# Altium PCB H-bridge_test.PcbDoc
Units mil, origin at the board's own origin, x right, y up, seen from the top; angles counter-clockwise.
Board outline 2420 x 2070 mil, 2 copper layers (Top Layer, Bottom Layer); 25 components, 24 nets, 89 pads, 74 vias.
Unrouted connection lines stored in the file: 16.
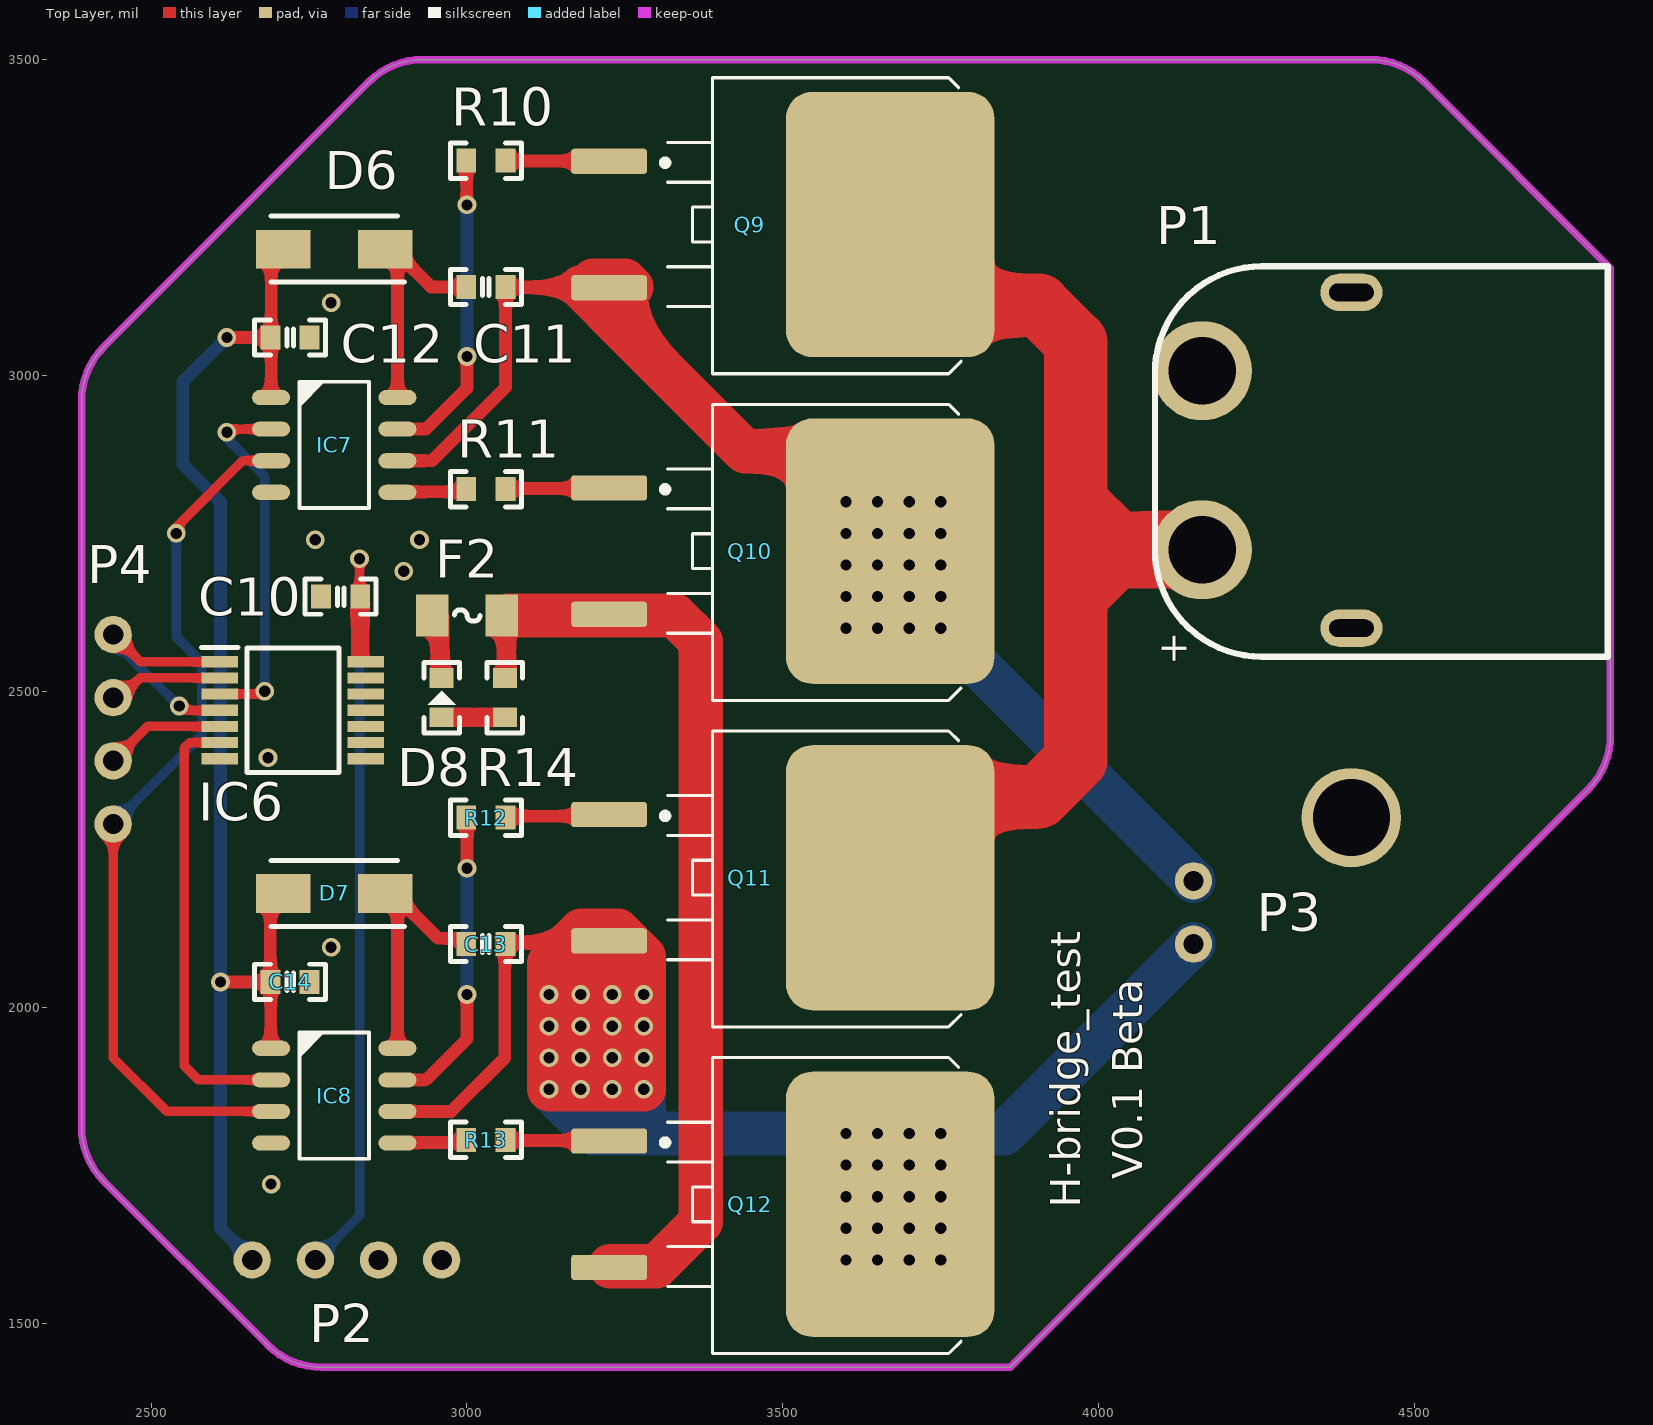
[diagram p0: Top Layer view]
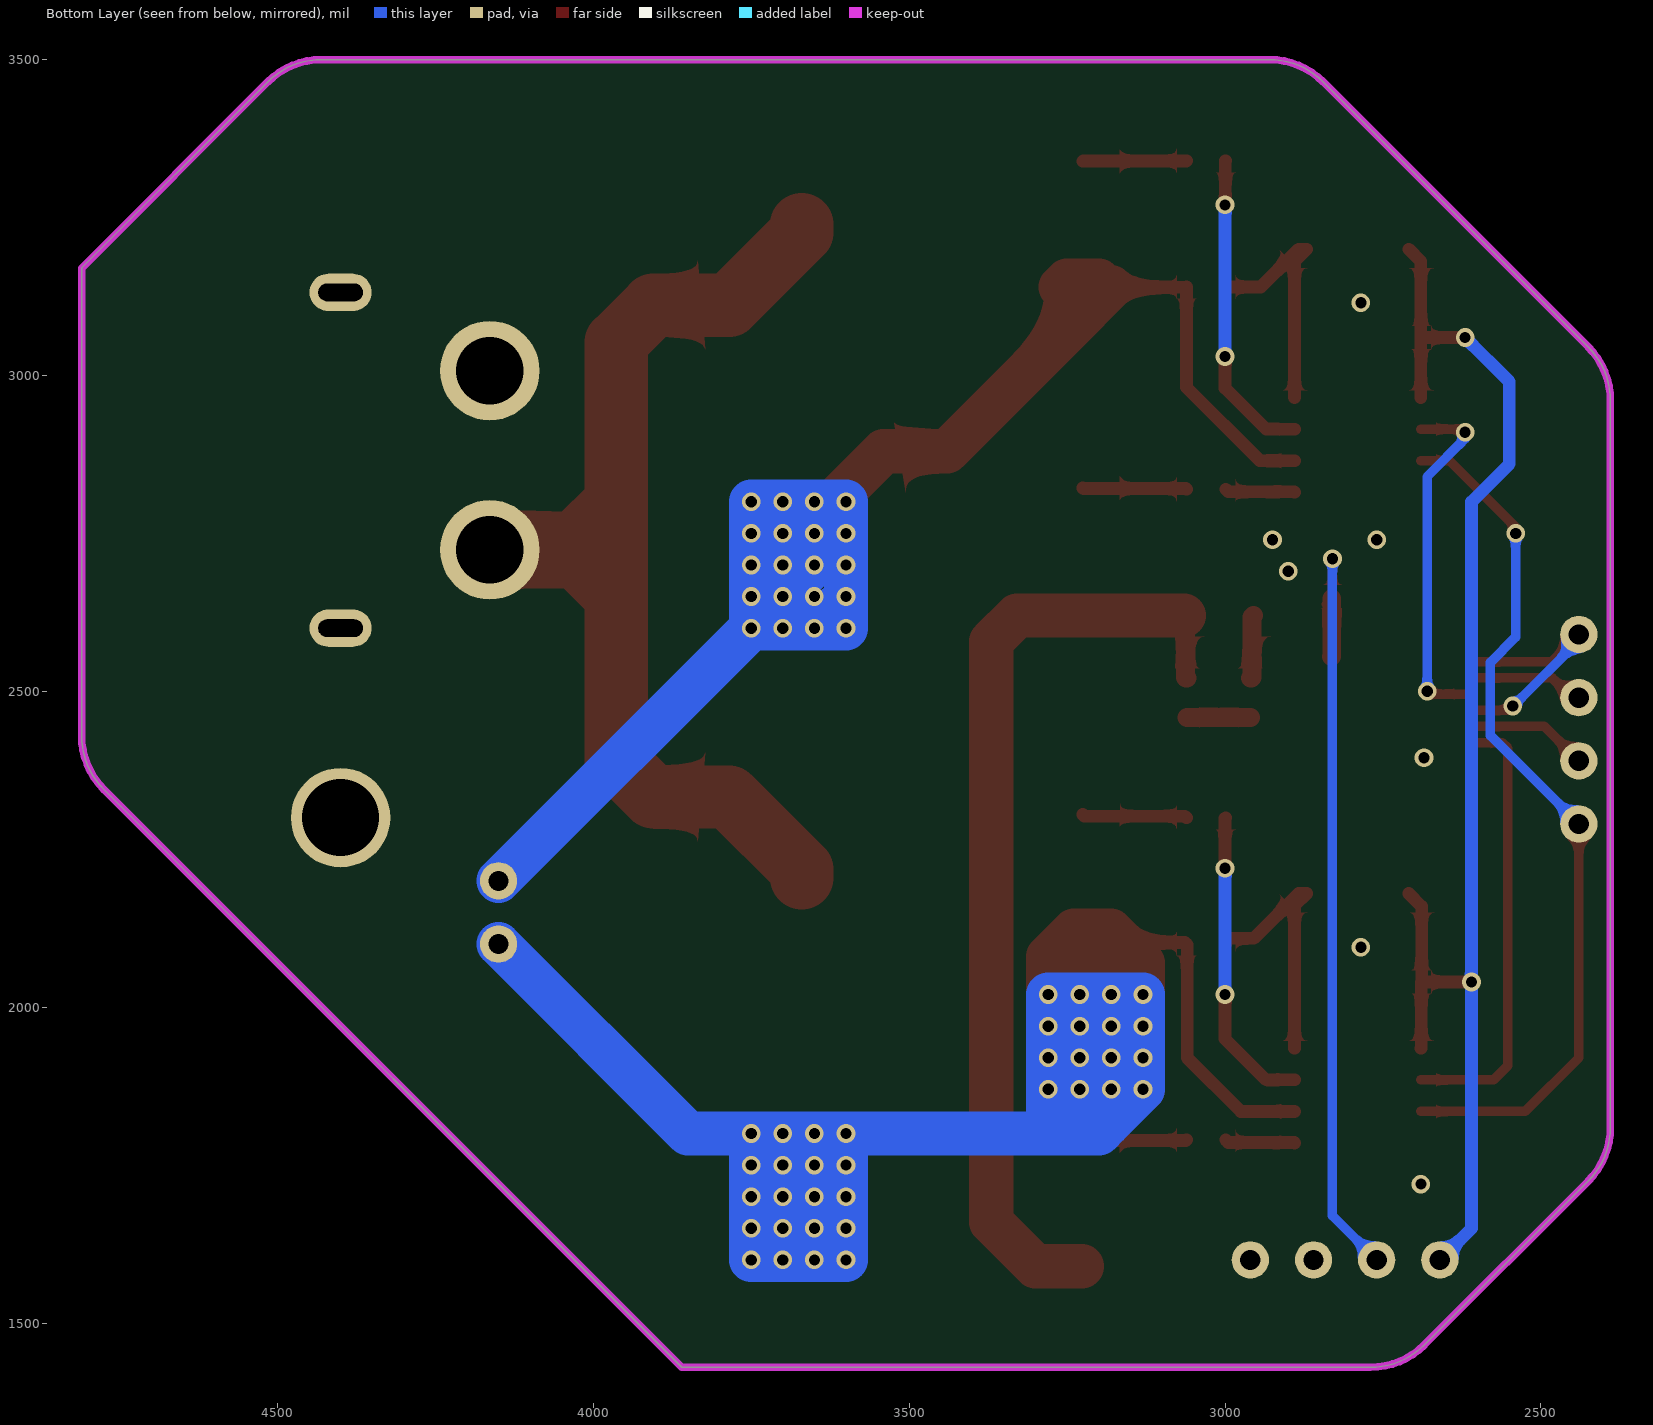
[diagram p1: Bottom Layer view, seen from below]
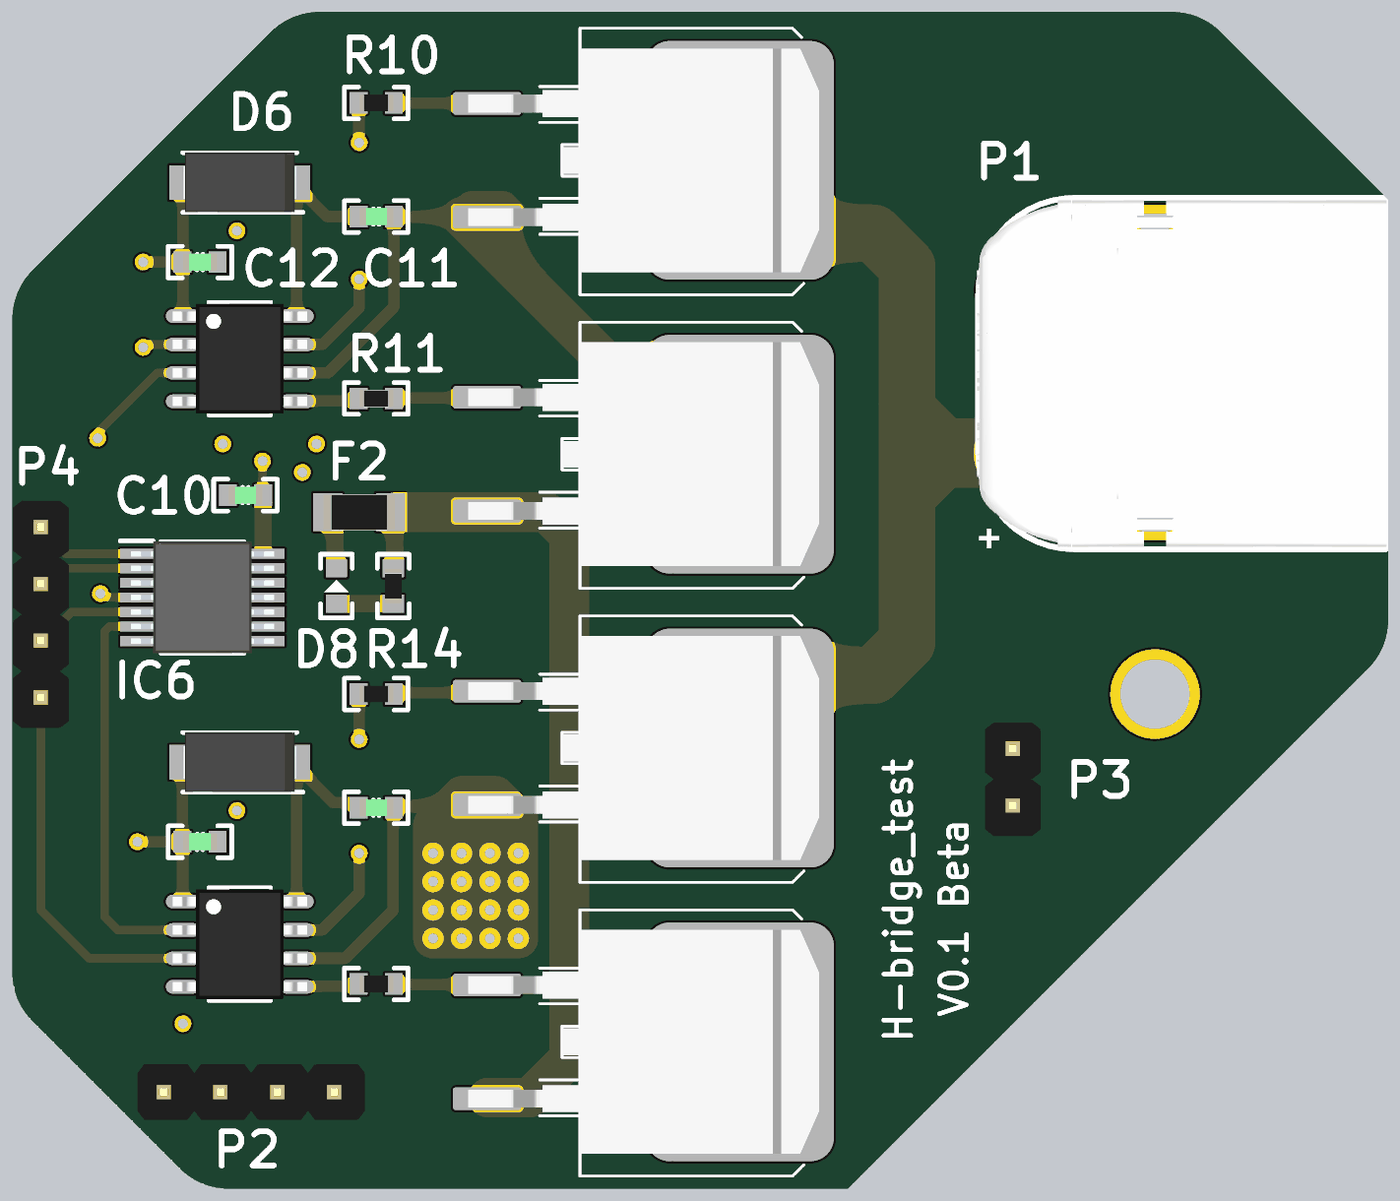
[diagram p2: 3D render of the assembled board from above, using the file's embedded part models]

## Layer stack, top to bottom
Top Solder: solder mask 0.4, Solder Resist, Dk 3.5
Top Layer: signal copper 1.4
Dielectric 1: dielectric 12.6, FR-4, Dk 4.8
Bottom Layer: signal copper 1.4
Bottom Solder: solder mask 0.4, Solder Resist, Dk 3.5

## Board outline
2425.36,1724.64 2684.64,1465.36 ccw(c2770,1550.71) 2770,1430 3860,1430 4774.64,2344.64 ccw(c4689.29,2430) 4810,2430 4810,3170 4515.36,3464.64 ccw(c4430,3379.29) 4430,3500 2930,3500 ccw(c2930,3379.29) 2844.64,3464.64 2425.36,3045.36 ccw(c2510.71,2960) 2390,2960 2390,1810 ccw(c2510.71,1810)

## Design rules (kind name [scope] priority, off if disabled: settings)
Clearance [All] p1: gap=10 ignorepadtopadclearanceinfootprint=FALSE except(0: Arc-Hole Track-Hole SMDPad-Hole THPad-Hole Via-Hole Fill-Hole Poly-Hole Region-Hole Text-Hole)
PlaneConnect [All] p1: planeconnectstyle=Direct reliefexpansion=20 reliefentries=4 reliefconductorwidth=10 reliefairgap=10
PolygonConnect [All] p1: connectstyle=Direct reliefconductorwidth=10 reliefentries=4 polygonreliefangle="90 Angle" airgapwidth=10
RoutingVias [All] p1: holewidth=17.72 width=29.53 viastyle="Through Hole" minholewidth=17.72 minwidth=29.53 maxholewidth=17.72 maxwidth=29.53
SolderMaskExpansion [All] p1: expansion=4 istentingtop=FALSE
Width [All] p1: maxlimit=100 minlimit=15 preferedwidth=15
29 further rules are at their usual default settings.

## Components (designator, comment, footprint, x,y, rotation, side; value= is the part's Value field where it differs from the comment)
C10 "100nF" CAP-0603 2800,2650 r0 top
C11 "1uF/25V" CAP-0603 3030,3140 r0 top
C12 "100nF" CAP-0603 2720,3060 r180 top
C13 "1uF/25V" CAP-0603 3030,2100 r0 top
C14 "100nF" CAP-0603 2720,2040 r180 top
D6 "SS14" DO-214AC_SMA 2790,3200 r180 top
D7 "SS14" DO-214AC_SMA 2790,2180 r180 top
D8 "LED-RED" LED-0603 2960,2490 r90 top
F2 "JFC1206-2300FS" FUSE_1206 3000,2620 r180 top
IC6 "SN74HC08PW" TSSOP14 2724.33,2470 r0 top
IC7 "IR2104S" SOIC_8 2790,2890 r270 top
IC8 "IR2104S" SOIC_8 2790,1860 r270 top
P1 "XT30/60" XT60PW-M 4163.78,3007.48 r270 top
P2 "HDR1x4_2.54" HDR1x4_2.54_180 2660,1600 r90 top
P3 "HDR1x2_2.54" HDR1X2_2.54_180 4150,2200 r0 top
P4 "HDR1x4_2.54" HDR1x4_2.54_180 2440,2590 r0 top
Q9 "IRF3205S" D2PAK-3 3447.5,3238.89 r180 top
Q10 "IRF3205S" D2PAK-3 3447.5,2721.95 r180 top
Q11 "IRF3205S" D2PAK-3 3447.5,2205 r180 top
Q12 "IRF3205S" D2PAK-3 3447.5,1688.05 r180 top locked
R10 "51R" R-0603 3030,3340 r0 top
R11 "51R" R-0603 3030,2820 r0 top
R12 "51R" R-0603 3030,2300 r0 top
R13 "51R" R-0603 3030,1790 r0 top
R14 "4.7k" R-0603 3060,2490 r270 top

## Footprints (in the part's own frame and the unit in brackets; to place one, negate y for a bottom-side part, rotate by r counter-clockwise, add the part's x,y. Pads: shape width x height; smd on the part's side, far side on the other; paste and mask are expansions set on the pad)
CAP-0603 [mm]
  rect 0.8x0.96 smd: 1(-0.79,0) 2(0.79,0)
  silkscreen extent -1.42,-0.71 1.42,0.71, body extent -0.76,-0.39 0.76,0.39, height 0.9
D2PAK-3 [mil] "D-PAK/TO-263-3; 3 Leads (1 Cropped); Body 14.7 (inc. leads) x 10.2 mm (LxW max)"
  round 20 on Mech15: 0(0,0)
  rrect25% 120x40 smd: 1(222.5,-100) 2(222.5,100)
  rrect25% 330x420 smd: 3(-222.5,0)
  silkscreen extent -335,-232 139,236, body extent -361,-197 256,197, height 189
DO-214AC_SMA [mm]
  rect 2.2x1.55 smd: 1(2.05,0) 2(-2.05,0)
  silkscreen extent -2.83,-1.33 2.55,1.33, body extent -2.55,-1.33 2.55,1.33, height 2.29
FUSE_1206 [mm]
  rect 1.3x1.7 smd: 1(-1.4,0) 2(1.4,0)
  silkscreen extent -0.53,-0.23 0.51,0.23, body extent -1.6,-0.8 1.6,0.8, height 1.01
HDR1X2_2.54_180 [mm]
  round 1.5 hole 0.813: 1(0,0) 2(0,-2.54)
  body extent -1.25,-3.81 1.25,1.27, height 8.2
HDR1x4_2.54_180 [mm]
  round 1.5 hole 0.813: 1(0,0) 2(0,-2.54) 3(0,-5.08) 4(0,-7.62)
  body extent -1.25,-8.89 1.25,1.27, height 8.2
LED-0603 [mm]
  rect 0.8x0.96 smd: 1(-0.79,0) 2(0.79,0)
  silkscreen extent -1.42,-0.71 1.42,0.71, body extent -0.81,-0.4 0.81,0.4, height 0.6
R-0603 [mm]
  rect 0.8x0.96 smd: 1(-0.79,0) 2(0.79,0)
  silkscreen extent -1.42,-0.71 1.42,0.71, body extent -0.76,-0.38 0.76,0.38, height 0.41
SOIC_8 [mil]
  oval 24x60 smd: 1(-75,-100.02) 2(-25,-100.02) 3(25,-100.02) 4(75,-100.02) 5(75,99.98) 6(25,99.98) 7(-25,99.98) 8(-75,99.98)
  silkscreen extent -100,-55 100,55, body extent -96,-118 96,118, height 69
TSSOP14 [mm]
  rect 1.475x0.45 smd: 1(-2.938,1.95) 2(-2.938,1.3) 3(-2.938,0.65) 4(-2.938,0) 5(-2.938,-0.65) 6(-2.938,-1.3) 7(-2.938,-1.95) 8(2.938,-1.95) 9(2.938,-1.3) 10(2.938,-0.65) 11(2.938,0) 12(2.938,0.65) 13(2.938,1.3) 14(2.938,1.95)
  silkscreen extent -3.67,-2.5 1.85,2.52, body extent -3.2,-2.5 3.2,2.5, height 1.2
XT60PW-M [mm]
  oval 1.5x2.5 hole 0.7 slot 1.8 at 90 deg: 0(-3.15,6) 0(10.35,6)
  round 4 hole 2.7: 1(7.2,0) 2(0,0)
  silkscreen extent -4.2,-1.9 11.5,16.3, body extent -4.3,-1.95 11.6,16.35, height 8.45

## Part data
C10 C11 C12 C13 C14: library part CAP, "贴片电容", Package=0402, SuppliersPartNumber=C52923, ComponentLink1Description=供应商链接, ComponentLink1URL=http://www.szlcsc.com/product/details_53938.html, Supplier=LC
D6 D7: library part DIODE, "二极管", Package=SMA(DO-214AC), SuppliersPartNumber=C22452, ComponentLink1Description=供应商链接, ComponentLink1URL=http://www.szlcsc.com/product/details_23178.html, Supplier=LC
D8: library part LED, "发光二极管", Package=0603, SuppliersPartNumber=C2290, ComponentLink1Description=供应商链接, ComponentLink1URL=http://www.szlcsc.com/product/details_2663.html, Supplier=LC
F2: library part Fuse, "一次性贴片保险丝"
IC6: "Integrated Circuit", Arrow Part Number=SN74HCT08PW, Manufacturer_Name="Texas Instruments", Mouser Part Number=595-SN74HCT08PW, Arrow Price/Stock=https://www.arrow.com/en/products/sn74hct08pw/texas-instruments, Datasheet Link=http://www.ti.com/lit/gpn/SN74HCT08, Height=1.2mm, Manufacturer_Part_Number=SN74HCT08PW, Mouser Price/Stock=https://www.mouser.co.uk/ProductDetail/Texas-Instruments/SN74HCT08PW?qs=7KMwW2o1%252BmRuz7pKtn1cmg%3D%3D
IC7 IC8: "Integrated Circuit", Manufacturer_Name=Infineon, Datasheet Link=http://www.infineon.com/dgdl/ir2104.pdf?fileId=5546d462533600a4015355c7c1c31671, Height=1.75mm, Manufacturer_Part_Number=IR2104S
P2 P3 P4: "Header"
Q9 Q10 Q11 Q12: library part N-MOS, "N 沟道 MOS", Manufacturer_Name=Nexperia, Manufacturer_Part_Number=SI2302DS, Mouser Part Number=N/A, RS Part Number=7983053P, Datasheet Link=https://assets.nexperia.com/documents/data-sheet/SI2302DS.pdf, Height=1.1mm, Mouser Price/Stock=https://www.mouser.com/Search/Refine.aspx?Keyword=N%2FA, RS Price/Stock=http://uk.rs-online.com/web/p/products/7983053P
R10 R11 R12 R13 R14: library part RES, "贴片电阻", Package=0805, SuppliersPartNumber=C17798, Supplier=LC

## Free pads (board coordinates)
  round 157.48 hole 122.05: 2(4400,2300)

## Via types
v1: diameter 29.53, hole 17.72, Top Layer to Bottom Layer, 74 vias

## Nets (pads, with @x,y where several pads share a name; then routed paths per layer and width w, separated by ;. In a path a pad name is that pad's centre, name@x,y a point inside that pad or via, vN(x,y) a via of type N, cw(c..) or ccw(c..) an arc to the next point about the centre after c; other vN are vias at no path point)
5V: C10.2 IC6.14 P2.2 | length 1377.3
  Top Layer w15: v1(2830,2710) 2830,2581.1 2831.1,2580 ; C10.2 2831.1,2646.85 C10.2@2840,2637.95
  Top Layer w30: C10.2@2831.1,2646.85 2831.1,2580 2831.1,2555.67 IC6.14@2831.73,2555.04
  Bottom Layer w15: P2.2 2830,1670 v1(2830,2710)
12V: C12.2 C14.2 D6.1 D7.1 IC7.1 IC8.1 P2.1 | length 2179.3
  Top Layer w20: v1(2610,2040) C14.2 ; v1(2620,3060) C12.2 ; IC8.1 2689.44,1935.54 2689.44,2039.46 C14.2 ; IC7.1 2689.98,3180.69 D6.1 ; D7.1 2688.9,2159.61 C14.2
  Bottom Layer w20: v1(2620,3060) 2550,2990 2550,2860 2610,2800 v1(2610,2040) 2610,1650 P2.1
DIR1A: IC6.2 P4.2 | length 181.6
  Top Layer w15: P4.2 2451.22,2490 2482.4,2521.18 IC6.2
DIR1B: IC6.5 P4.3 | length 191.2
  Top Layer w15: P4.3 2494.41,2444.41 IC6.5
FUSE: F2.1 Q10.2 Q12.2 R14.1 | length 1511.1
  Top Layer w30: R14.1 3061.81,2521.1 3062.56,2521.85 F2.1@3062.56,2617.44 ; F2.1@3072.56,2612.44 F2.1@3075.12,2615
  Top Layer w70: F2.1@3065.12,2620 Q10.2@3223.05,2620 ; Q12.2@3226.95,1590 3300,1590 3370,1660 3370,2578.99 3328.99,2620 Q10.2@3226.95,2620
GND: C10.1 C12.1 C14.1 D8.2 F2.2 IC6.7 IC7.4 IC8.4 P1.2 P2.3 P2.4 | length 102.1
  Top Layer w30: F2.2@2954.88,2620 2957.44,2617.44 2957.44,2521.85 2958.19,2521.1 D8.2
  other v1: 2690,1720 2785,2095 2685,2395 2900,2690 2760,2740 2925,2740 2785,3115
M1A: C11.2 IC7.6 P3.1 Q9.2 Q10.3 | length 3108.5
  Top Layer w20: IC7.6 2945,2865 3061.1,2981.1 C11.2 3061.66,3139.45 3180.55,3139.45 3224.45,3139.45 Q9.2
  Top Layer w70: Q9.2@3180.55,3139.45 3250,3070 ; Q9.2@3200,3150 Q9.2@3213.89,3150 ; Q9.2@3224.45,3139.45 Q9.2@3213.89,3150 ; Q9.2 3226.11,3140 Q9.2@3250,3140 ; Q10.3 3670,2750.48 3540.48,2880 3440,2880 3250,3070 ; Q9.2@3213.89,3150 Q9.2@3250,3150 ; 3250,3070 Q9.2@3250,3140 ; Q9.2@3250,3140 Q9.2@3250,3150 ; Q9.2@3250,3140 3260,3140 Q9.2@3250,3150
  Bottom Layer w70: v1(3650,2750) v1(3650,2700) v1(3700,2650) 3725,2625 ; v1(3700,2700) v1(3700,2750) v1(3700,2800) ; P3.1 v1(3750,2600) ; v1(3600,2650) 3625,2625 3725,2625 ; v1(3600,2650) v1(3600,2700) v1(3600,2750) v1(3600,2800) v1(3650,2800) v1(3700,2800) ; v1(3600,2650) v1(3600,2600) v1(3650,2600) v1(3700,2600) v1(3750,2600) ; v1(3700,2800) v1(3750,2800) v1(3750,2750) v1(3750,2700) v1(3750,2650) v1(3750,2600) ; 3725,2625 v1(3750,2600)
  other v1: 3650,2650
M1B: C13.2 IC8.6 P3.2 Q11.2 Q12.3 | length 5371.6
  Top Layer w20: IC8.6 2975,1835 3060,1920 3060,2098.9 C13.2 3063.6,2102.5 3162.5,2102.5 3212.5,2102.5 3222.5,2102.5 Q11.2
  Top Layer w70: v1(3180,1920) v1(3230,1920) ; Q11.2@3222.5,2102.5 3230,2095 v1(3230,2020) ; v1(3230,1970) v1(3180,1970) v1(3130,1970) ; v1(3130,1970) v1(3130,2020) ; v1(3130,1970) v1(3130,1920) v1(3130,1870) v1(3180,1870) v1(3230,1870) v1(3280,1870) v1(3280,1920) v1(3280,1970) v1(3280,2020) ; v1(3130,2020) 3212.5,2102.5 3215,2105 Q11.2 3235,2105 3280,2060 ; v1(3130,2020) 3130,2070 3162.5,2102.5 3181.01,2121.01 3238.99,2121.01 3280,2080 3280,2060 ; v1(3130,2020) v1(3180,2020) v1(3230,2020) ; v1(3230,2020) v1(3280,2020) ; v1(3280,2020) 3280,2060
  Bottom Layer w70: v1(3230,1970) v1(3180,2020) ; P3.2 3850,1800 v1(3750,1800) ; v1(3130,1870) 3185.48,1814.52 ; v1(3130,1870) v1(3180,1870) v1(3230,1870) ; v1(3130,1870) v1(3130,1920) ; v1(3130,1920) v1(3180,1920) v1(3230,1920) ; v1(3130,1920) v1(3130,1970) v1(3130,2020) ; v1(3130,2020) v1(3180,1970) v1(3230,1920) ; v1(3130,2020) v1(3180,2020) ; v1(3180,2020) v1(3230,2020) 3250,2020 ; 3185.48,1814.52 3200,1800 3265.48,1800 ; 3185.48,1814.52 3251.31,1814.52 ; v1(3230,1870) v1(3230,1920) ; v1(3230,1870) 3251.31,1870 ; 3250,2020 v1(3280,2020) v1(3280,1970) v1(3280,1920) v1(3280,1870) ; 3250,2020 3251.31,2018.69 3251.31,1870 ; 3251.31,1814.52 3251.31,1870 ; 3251.31,1814.52 3251.31,1814.17 3265.48,1800 ; 3251.31,1814.52 3280,1814.52 ; 3251.31,1870 v1(3280,1870) ; 3265.48,1800 v1(3600,1800) ; 3265.48,1800 3280,1814.52 ; 3280,1814.52 v1(3280,1870) ; v1(3600,1800) v1(3600,1750) v1(3600,1700) v1(3600,1650) v1(3600,1600) v1(3650,1600) ; v1(3600,1800) v1(3650,1800) ; v1(3650,1600) v1(3650,1650) v1(3650,1700) v1(3650,1750) v1(3650,1800) ; v1(3650,1600) v1(3700,1600) ; v1(3650,1800) v1(3700,1800) ; v1(3700,1600) v1(3700,1650) v1(3700,1700) v1(3700,1750) v1(3700,1800) ; v1(3700,1600) v1(3750,1600) v1(3750,1650) v1(3750,1700) v1(3750,1750) v1(3750,1800) ; v1(3700,1800) v1(3750,1800)
NetC11_1: C11.1 D6.2 IC7.8 | length 396
  Top Layer w20: IC7.8 2889.98,3180.72 D6.2 2883.5,3200 2943.5,3140 C11.1
NetC13_1: C13.1 D7.2 IC8.8 | length 416.2
  Top Layer w20: IC8.8 2889.98,2160.72 D7.2 2883.5,2180 2954.61,2108.9 2993.15,2108.9 2998.9,2103.15 C13.1
NetD8_A: D8.1 R14.2 | length 100
  Top Layer w30: D8.1 R14.2
NetIC7_5: IC7.5 R11.1 | length 111
  Top Layer w20: IC7.5 2890.75,2815.76 2994.66,2815.76 R11.1
NetIC7_7: IC7.7 R10.1 | length 497.4
  Top Layer w20: IC7.7 2935,2915 3000,2980 v1(3000,3030) ; R10.1 2999.45,3339.45 2999.45,3270.55 v1(3000,3270)
  Bottom Layer w20: v1(3000,3030) v1(3000,3270)
NetIC8_5: IC8.5 R13.1 | length 111
  Top Layer w20: IC8.5 2890.75,1785.76 2994.66,1785.76 R13.1
NetIC8_7: IC8.7 R12.1 | length 487.4
  Top Layer w20: IC8.7 2935,1885 3000,1950 v1(3000,2020) ; R12.1 3000,2298.9 v1(3000,2220)
  Bottom Layer w20: v1(3000,2020) v1(3000,2220)
NetQ9_1: Q9.1 R10.2 | length 164.4
  Top Layer w20: R10.2 3061.66,3339.45 3224.45,3339.45 Q9.1
NetQ10_1: Q10.1 R11.2 | length 164.7
  Top Layer w20: R11.2 3062.08,2820.97 3224.03,2820.97 Q10.1
NetQ11_1: Q11.1 R12.2 | length 166
  Top Layer w20: R12.2 3063.6,2302.5 3222.5,2302.5 Q11.1
NetQ12_1: Q12.1 R13.2 | length 164.7
  Top Layer w20: R13.2 3062.08,1789.03 3224.03,1789.03 Q12.1
PWM1: IC6.1 IC6.4 P4.1 | length 410.4
  Top Layer w15: P4.1 2483.23,2546.77 IC6.1 ; v1(2544.76,2476.67) 2551.44,2470 IC6.4
  Bottom Layer w15: P4.1 2440,2580.6 2543.93,2476.67 v1(2544.76,2476.67)
PWM1A: IC6.3 IC7.2 | length 580.1
  Top Layer w15: IC6.3 2671.66,2495.59 2676.07,2500 v1(2680,2500) ; v1(2620,2910) 2625,2915 IC7.2
  Bottom Layer w15: v1(2620,2910) 2620,2900 2680,2840 v1(2680,2500)
PWM1B: IC6.6 IC8.2 | length 709.3
  Top Layer w15: IC6.6 2561.18,2418.82 2552.39,2410.03 2552.39,1907.61 2575,1885 IC8.2
SD: IC7.3 IC8.3 P4.4 | length 1393.2
  Top Layer w15: P4.4 2440,1920 2525,1835 IC8.3 ; v1(2540,2750) 2540,2760 2645,2865 IC7.3
  Bottom Layer w15: P4.4 2580,2430 2580,2545.74 2540,2585.74 v1(2540,2750)
VM: P1.1 Q9.3 Q11.3 | length 2080.2
  Top Layer w100: Q11.3 3670,2217.77 3785,2332.77 3905.2,2332.77 3963.78,2391.35 3963.78,2650 ; Q9.3 3670,3226.13 3785,3111.13 3905.2,3111.13 3963.78,3052.55 3963.78,2800 ; 3963.78,2650 3963.78,2724.02 ; 3963.78,2650 4026.8,2713.02 4152.78,2713.02 P1.1 ; 3963.78,2724.02 3963.78,2800 ; 3963.78,2724.02 P1.1 ; 3963.78,2800 4028.77,2735.01 4152.78,2735.01 P1.1
pads on no net: IC6.8 IC6.9 IC6.10 IC6.11 IC6.12 IC6.13 P1.0 Q9.0 Q10.0 Q11.0 Q12.0

## Polygon pours and split planes (outlines as drawn)
GND on Bottom Layer "GND_L02_P000" (solid, remove dead copper, pour order 0): 3550,6745 3550,4345 6550,4345 6650,4445 6650,6745
GND on Top Layer "GND_L01_P001" (solid, remove dead copper, pour order 1): 3350,6845 3350,3945 6850,3945 6850,6845

## Keep-outs
Keep-Out Layer:
  lines w12: 2390,1810 ccw(c2510.71,1810) 2425.36,1724.64 2684.64,1465.36 ccw(c2770,1550.71) 2770,1430 3860,1430 4774.64,2344.64 ccw(c4689.29,2430) 4810,2430 4810,3060 4810,3170 4515.36,3464.64 ccw(c4430,3379.29) 4430,3500 2930,3500 ccw(c2930,3379.29) 2844.64,3464.64 2425.36,3045.36 ccw(c2510.71,2960) 2390,2960 2390,1810

## Silkscreen, mask and mechanical layers (free items; w line width, h text height)
Top Overlay:
  text "V0.1 Beta" at 4068.61,1727.87 h47.24 r90
  text "H-bridge_test" at 3970.74,1682.87 h47.24 r90
Mechanical 1:
  lines w12: 2390,1810 ccw(c2510.71,1810) 2425.36,1724.64 2684.64,1465.36 ccw(c2770,1550.71) 2770,1430 3860,1430 4774.64,2344.64 ccw(c4689.29,2430) 4810,2430 4810,3060 4810,3170 4515.36,3464.64 ccw(c4430,3379.29) 4430,3500 2930,3500 ccw(c2930,3379.29) 2844.64,3464.64 2425.36,3045.36 ccw(c2510.71,2960) 2390,2960 2390,1810

## Text inside footprints (layer, text, board x,y; h text height)
P1: Top Overlay "+" at 4085.04,2594.09 h78.74 r270